# Altium PCB AS5045.PcbDoc
Units mil, origin at the board's own origin, x right, y up, seen from the top; angles counter-clockwise.
Board outline 1199.85 x 1200 mil, 2 copper layers (Top Layer, Bottom Layer); 5 components, 8 nets, 35 pads, 3 vias.
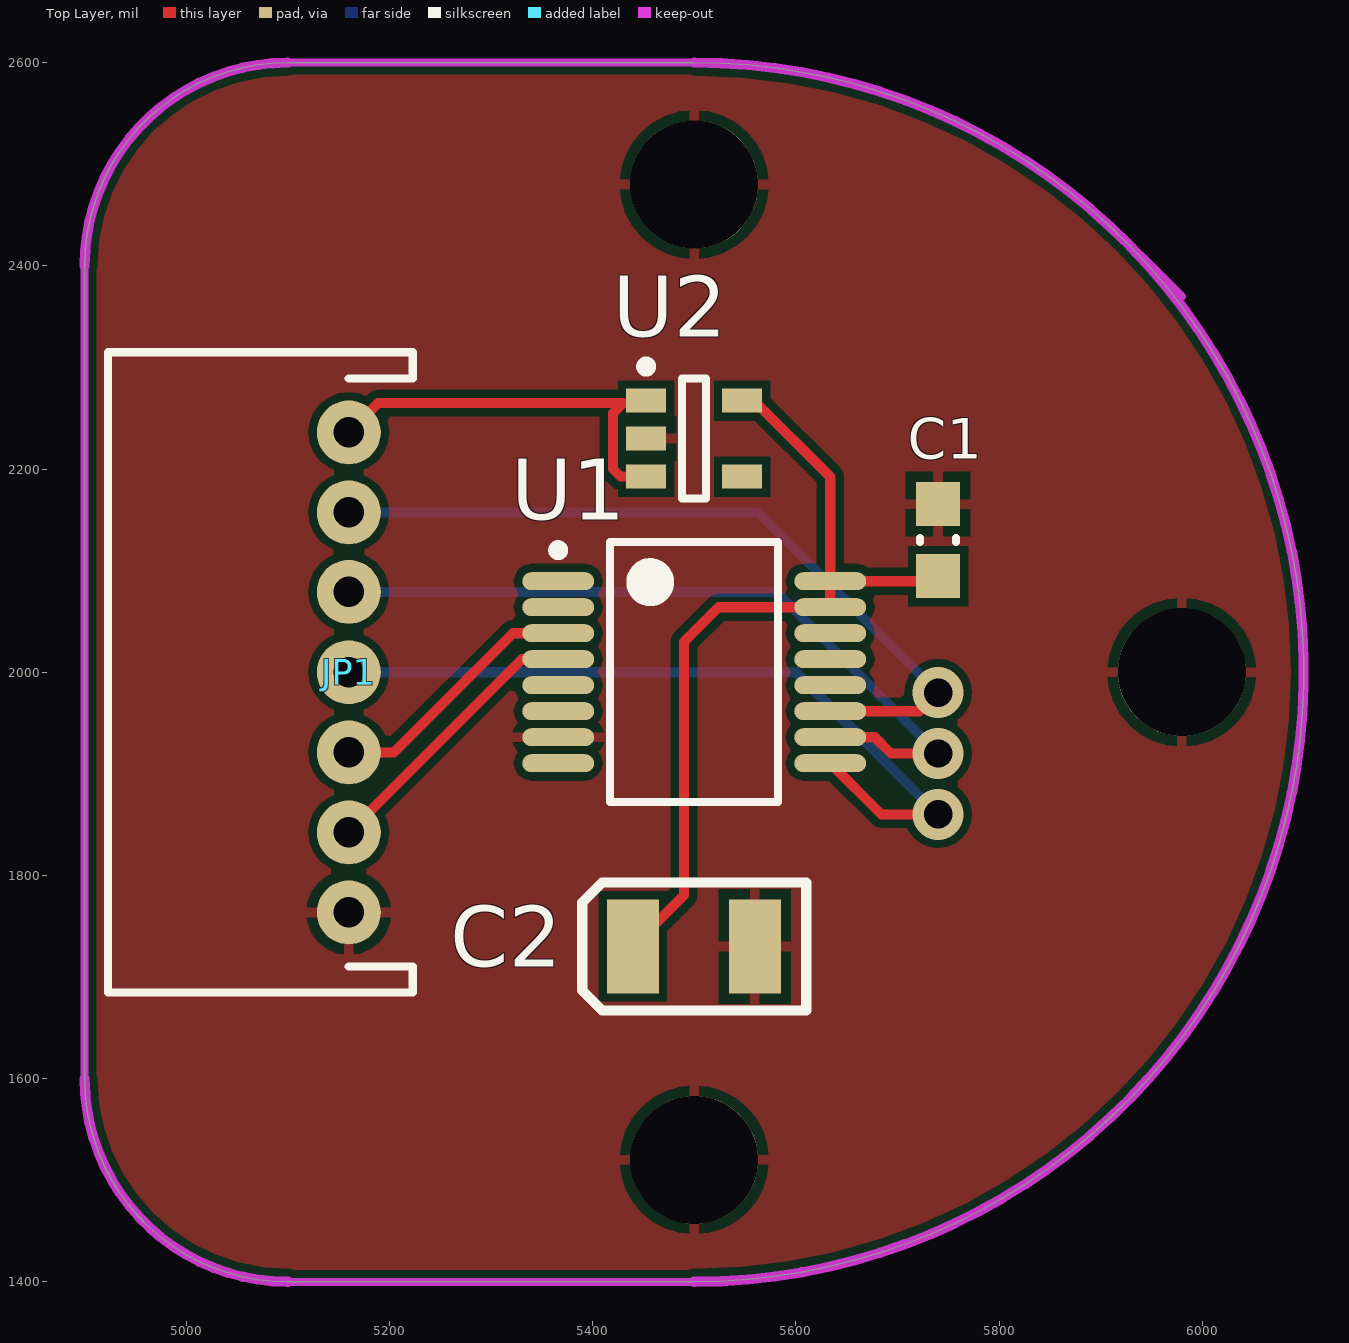
[diagram p0: Top Layer view]
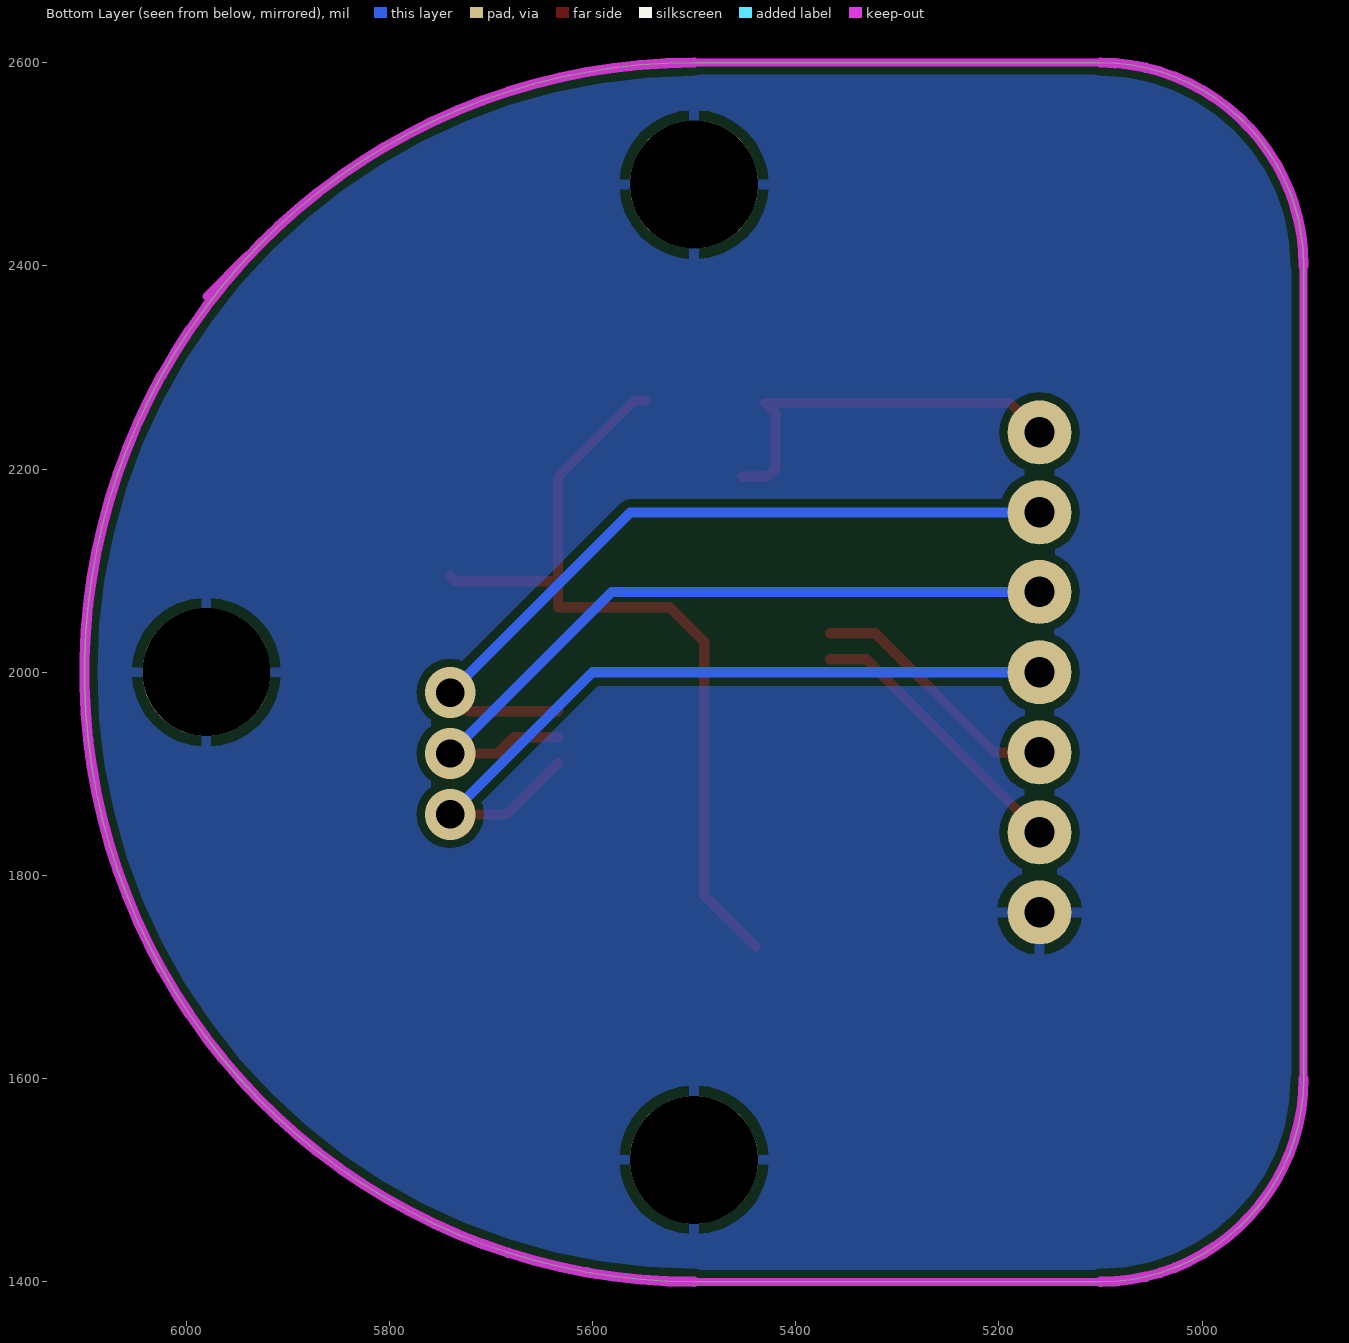
[diagram p1: Bottom Layer view, seen from below]

## Layer stack, top to bottom
Top Solder: solder mask 0.4, Solder Resist, Dk 3.5
Top Layer: signal copper 1.4
Dielectric 1: dielectric 12.6, FR-4, Dk 4.8
Bottom Layer: signal copper 1.4
Bottom Solder: solder mask 0.4, Solder Resist, Dk 3.5

## Board outline
4900,1600 ccw(c5100,1600) 5100,1400 5500,1400 ccw(c5500,2000) 5500,2600 5100,2600 ccw(c5100,2400) 4900,2400

## Design rules (kind name [scope] priority, off if disabled: settings)
Clearance [All] p1: gap=7.87
PolygonConnect [All] p1: connectstyle=Relief reliefconductorwidth=10 reliefentries=4 polygonreliefangle="90 Angle" airgapwidth=10
RoutingVias [All] p1: holewidth=28 width=50 viastyle="Through Hole" minholewidth=28 minwidth=50 maxholewidth=28 maxwidth=50
SolderMaskExpansion [All] p1: expansion=4
Width [All] p1: maxlimit=10 minlimit=10 preferedwidth=10
30 further rules are at their usual default settings.

## Components (designator, comment, footprint, x,y, rotation, side; value= is the part's Value field where it differs from the comment)
C1 "100nF" CAPC0603(1608)100_M 5740,2130 r270 top
C2 "100uF" AVX-CAPC7343_V 5500,1730 r0 top
JP1 "" JST-7-PTH 5160,2000 r90 top
U1 "AS5045B" AMS-SSOP-16-6200X5300DE_L 5500,2000 r0 top
U2 "NCP603" SOT95P245X110-5N 5500,2230 r0 top

## Footprints (in the part's own frame and the unit in brackets; to place one, negate y for a bottom-side part, rotate by r counter-clockwise, add the part's x,y. Pads: shape width x height; smd on the part's side, far side on the other; paste and mask are expansions set on the pad)
AMS-SSOP-16-6200X5300DE_L [mm] "SOP, 16-Leads, Body 6.2x5.3mm, Pitch 0.65mm, IPC High Density"
  oval 1.8x0.45 smd: 1(-3.4,2.275) 2(-3.4,1.625) 3(-3.4,0.975) 4(-3.4,0.325) 5(-3.4,-0.325) 6(-3.4,-0.975) 7(-3.4,-1.625) 8(-3.4,-2.275) 9(3.4,-2.275) 10(3.4,-1.625) 11(3.4,-0.975) 12(3.4,-0.325) 13(3.4,0.325) 14(3.4,0.975) 15(3.4,1.625) 16(3.4,2.275)
  silkscreen extent -3.52,-3.25 2.1,3.25, body extent -2.8,-3.25 2.8,3.25, height 1.99
AVX-CAPC7343_V [mm] "SMT Capacitor, 2 Leads, Body 7.3x4.3mm"
  rect 1.3x2.35 smd: 1(-1.535,0.001) 2(1.515,0.001)
  silkscreen extent -2.8,-1.6 2.8,1.6, body extent -2.1,-1.1 2.1,1.1, height 1.9
CAPC0603(1608)100_M [mm] "Chip Capacitor, Body 1.6x0.8mm, Height 1.0mm, IPC Low Density"
  rect 1.1x1.1 smd: 1(-0.9,0) 2(0.9,0)
  silkscreen extent -0.05,-0.45 0.05,0.45, body extent -0.87,-0.47 0.88,0.48, height 1
JST-7-PTH [mil]
  round 63 hole 30: 1(-236.48,0) 2(-157.74,0) 3(-79,0) 4(0,0) 5(79,0) 6(157.22,0) 7(235.96,0)
  silkscreen extent -315,-63 315,237, body extent -353,-10 353,250, height 198
SOT95P245X110-5N [mm] "SOT23, 5-Leads, Body 2.90x2.45mm, Pitch 0.95mm, IPC Medium Density"
  rect 1x0.6 smd: ADJ(1.2,-0.95) ENABLE(-1.2,-0.95) GND(-1.2,0) Vin(-1.2,0.95) Vout(1.2,0.95)
  silkscreen extent -1.32,-1.5 0.3,1.92, body extent -0.7,-1.5 0.7,1.5, height 1.1

## Part data
C1: library part CMP-1035-02575-1, "CAP 100nF 6.3V ±5% 0603 (1608 Metric) Thickness 1mm SMD"
C2: library part AVX-CAP-P-2
JP1: library part JST_7_RIGHT
U1: library part CMP-0870-00004-1, "12-Bit Rotary Position Sensor with Digital Interface, 3.3 or 5 V, -40 to 125 degC, SSOP-16, Pb-Free, Reel"

## Free pads (board coordinates)
  round 125.98 hole 125.98: 2(5500,2480) 3(5980,2000) 4(5500,1520)

## Via types
v1: diameter 50, hole 28, Top Layer to Bottom Layer, 3 vias

## Nets (pads, with @x,y where several pads share a name; then routed paths per layer and width w, separated by ;. In a path a pad name is that pad's centre, name@x,y a point inside that pad or via, vN(x,y) a via of type N, cw(c..) or ccw(c..) an arc to the next point about the centre after c; other vN are vias at no path point)
5V: JP1.7 U2.ENABLE U2.Vin | length 387
  Top Layer w10: JP1.7 5189.04,2265 5430,2265 5420,2255 5420,2200 5427.4,2192.6 U2.ENABLE
A: JP1.3 U1.3 | length 254.8
  Top Layer w10: JP1.3 5204.31,1921 5321.69,2038.39 U1.3
B: JP1.2 U1.4 | length 276.8
  Top Layer w10: JP1.2 5330.54,2012.8 U1.4
CLK: JP1.5 U1.10 | length 758.6
  Top Layer w10: U1.10 5677.74,1936.02 5693.77,1920 v1(5740,1920)
  Bottom Layer w10: JP1.5 5581,2079 v1(5740,1920)
CS: JP1.6 U1.11 | length 767.2
  Top Layer w10: U1.11 5721.61,1961.61 v1(5740,1980)
  Bottom Layer w10: JP1.6 5562.78,2157.22 v1(5740,1980)
DIO: JP1.4 U1.9 | length 765
  Top Layer w10: U1.9 5684.29,1860 v1(5740,1860)
  Bottom Layer w10: JP1.4 5600,2000 v1(5740,1860)
GND: C1.1 C2.2 JP1.1 pad.2 pad.3 pad.4 U1.7 U2.GND
VCC: C1.2 C2.1 U1.15 U1.16 U2.Vout | length 833
  Top Layer w10: C2.1 5490,1780.47 5490,2030 5523.98,2063.98 U1.15 U1.16 ; U2.Vout 5558.68,2267.4 5633.86,2192.22 U1.16 ; C1.2 5735,2089.57 U1.16
pads on no net: U1.1 U1.2 U1.5 U1.6 U1.8 U1.12 U1.13 U1.14 U2.ADJ

## Polygon pours and split planes (outlines as drawn)
GND on Bottom Layer "GND_L02_P000" (solid, remove dead copper, pour order 0): 4900,2600 6100,2600 6100,1400 4900,1400
GND on Top Layer "GND_L01_P002" (solid, remove dead copper, pour order 2): 4899.43,2596.75 6099.43,2596.75 6099.43,1396.75 4899.43,1396.75

## Keep-outs
Keep-Out Layer:
  lines w7.87: 4900,1600 4900,2400 ; 5100,1400 5500,1400 ; 5100,2600 5500,2600 ; 5940,2410 5980,2370
  lines w10: 4900,1600 ccw(c5100,1600) 5100,1400 ; 4900,2400 cw(c5100,2400) 5100,2600 ; 5500,1400 ccw(c5500,2000) 5500,2600